# Altium PCB MainBoard.PcbDoc
Units mil, origin at the board's own origin, x right, y up, seen from the top; angles counter-clockwise.
Board outline 6000 x 4000 mil, 2 copper layers (Top Layer, Bottom Layer); 36 components, 41 nets, 155 pads, 0 vias.
Unrouted connection lines stored in the file: 82.
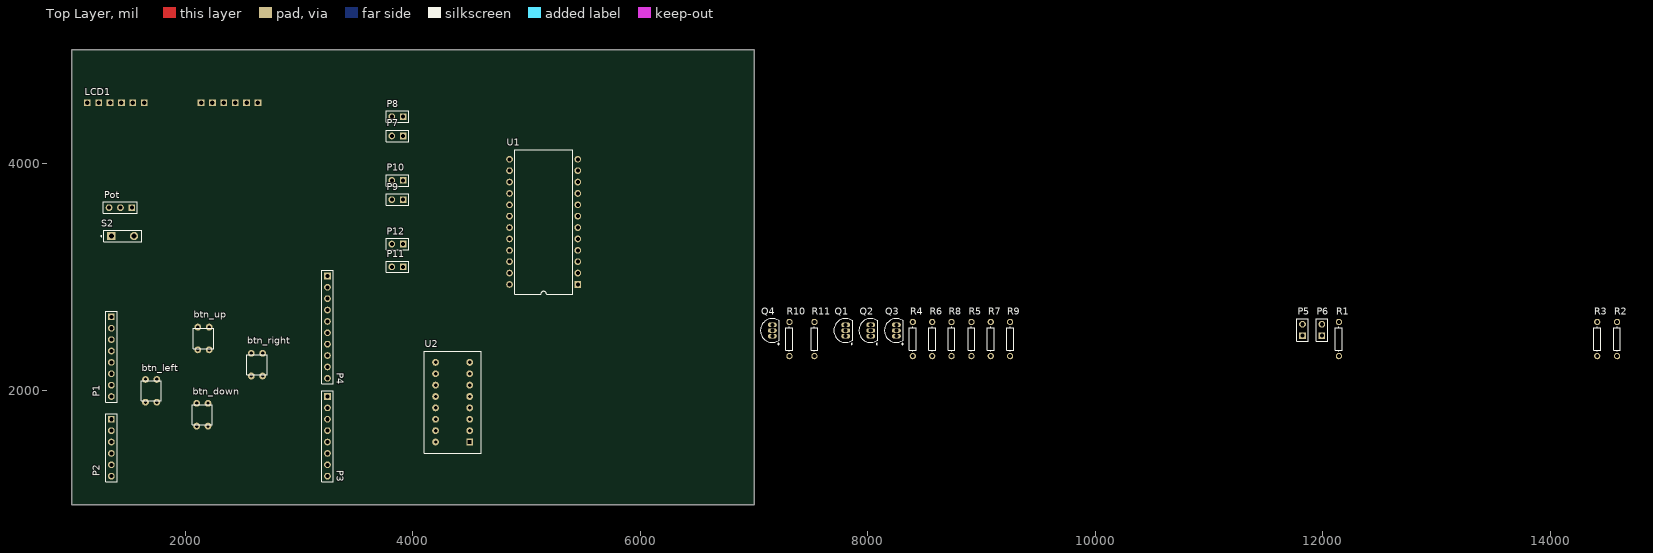
[diagram p0: Top Layer view]
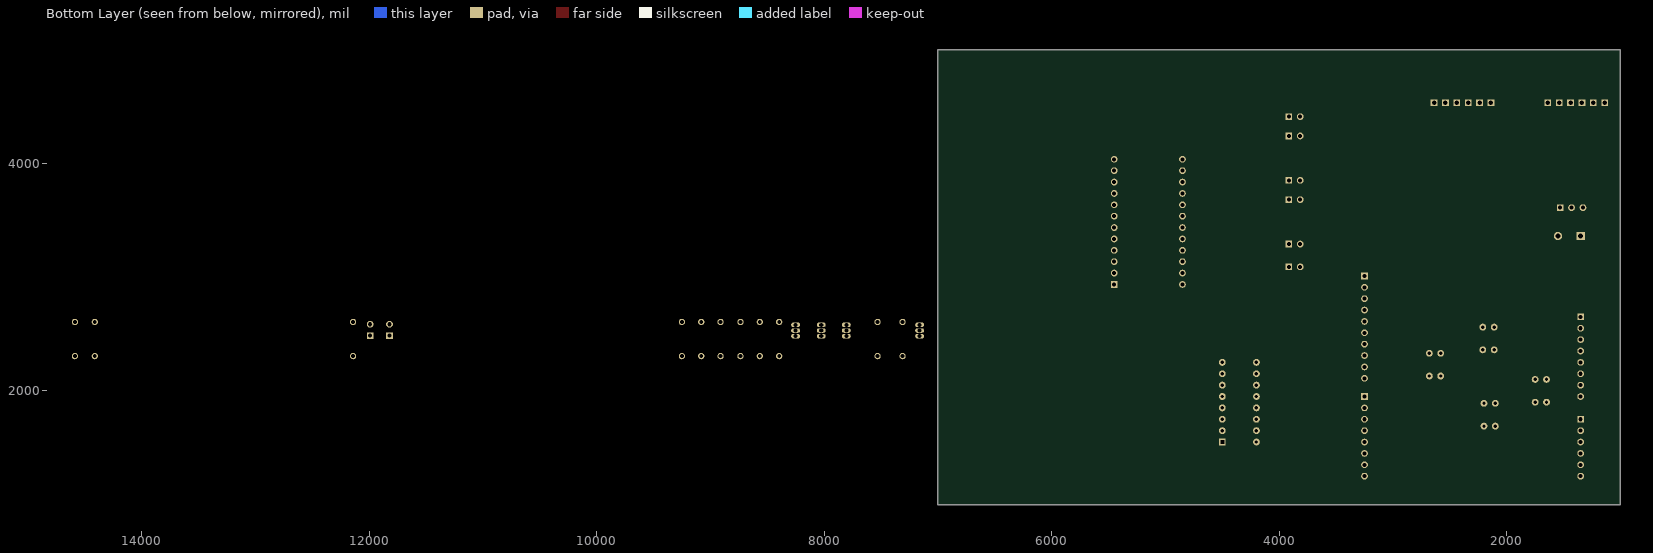
[diagram p1: Bottom Layer view, seen from below]

## Layer stack, top to bottom
Top Solder: solder mask 0.4, Solder Resist, Dk 3.5
Top Layer: signal copper 1.4
Dielectric 1: dielectric 12.6, FR-4, Dk 4.8
Bottom Layer: signal copper 1.4
Bottom Solder: solder mask 0.4, Solder Resist, Dk 3.5

## Board outline
1000,1000 7000,1000 7000,5000 1000,5000

## Design rules (kind name [scope] priority, off if disabled: settings)
Clearance [All] p1: gap=10
PolygonConnect [All] p1: connectstyle=Relief reliefconductorwidth=10 reliefentries=4 polygonreliefangle="90 Angle" airgapwidth=10
RoutingVias [All] p1: holewidth=28 width=50 viastyle="Through Hole" minholewidth=28 minwidth=50 maxholewidth=28 maxwidth=50
SolderMaskExpansion [All] p1: expansion=4
Width [All] p1: maxlimit=10 minlimit=10 preferedwidth=10
30 further rules are at their usual default settings.

## Components (designator, comment, footprint, x,y, rotation, side; value= is the part's Value field where it differs from the comment)
btn_down "SW-PB" swblue 2150,1790 r90 top
btn_left "SW-PB" swblue 1700,2000 r90 top
btn_right "SW-PB" swblue 2630,2230 r90 top
btn_up "SW-PB" swblue 2160,2460 r90 top
LCD1 "lcd" lcd_woborder 2400,3920 r0 top
P1 "Arudino UNO Power" HDR1X8 1350,2650 r270 top
P2 "Arduino UNO Analog" HDR1X6 1350,1750 r270 top
P3 "Arudino UNO Digital_1" HDR1X8 3250,1950 r270 top
P4 "Arduino UNO Digital_2" HDR1X10 3250,3010 r270 top
P5 "Valve_1" HDR1X2 11820,2485 r90 top
P6 "Valve_2" HDR1X2 11990,2485 r90 top
P7 "Valve_3" HDR1X2 3915,4240 r180 top
P8 "Valve_4" HDR1X2 3915,4410 r180 top
P9 "Valve_5" HDR1X2 3915,3680 r180 top
P10 "Valve_6" HDR1X2 3915,3850 r180 top
P11 "Valve_7" HDR1X2 3915,3090 r180 top
P12 "Valve_8" HDR1X2 3915,3290 r180 top
Pot "Pot" HDR1X3 1530,3610 r180 top
Q1 "NPN" TO-226-AA 7805,2530 r0 top
Q2 "NPN" TO-226-AA 8025,2530 r0 top
Q3 "NPN" TO-226-AA 8250,2530 r0 top
Q4 "NPN" TO-226-AA 7160,2530 r0 top
R1 "Res1" AXIAL-0.3 12140,2455 r90 top
R2 "Res1" AXIAL-0.3 14585,2455 r90 top
R3 "Res1" AXIAL-0.3 14410,2455 r90 top
R4 "Res1" AXIAL-0.3 8395,2455 r90 top
R5 "Res1" AXIAL-0.3 8910,2455 r90 top
R6 "Res1" AXIAL-0.3 8565,2455 r90 top
R7 "Res1" AXIAL-0.3 9080,2455 r90 top
R8 "Res1" AXIAL-0.3 8735,2455 r90 top
R9 "Res1" AXIAL-0.3 9250,2455 r90 top
R10 "Res1" AXIAL-0.3 7310,2455 r90 top
R11 "Res1" AXIAL-0.3 7530,2455 r90 top
S2 "Reset Switch" SPST-2 1450,3360 r0 top
U1 "HCC4067BF" CDIP24 5150,3485 r90 top
U2 "CD4099B" CB4099B 4350,1900 r90 top

## Footprints (in the part's own frame and the unit in brackets; to place one, negate y for a bottom-side part, rotate by r counter-clockwise, add the part's x,y. Pads: shape width x height; smd on the part's side, far side on the other; paste and mask are expansions set on the pad)
AXIAL-0.3 [mm] "Axial Device, Thru-Hole; 2 Leads; 0.3 in Pin Spacing"
  round 1.4 hole 0.85: 1(-3.81,0) 2(3.81,0)
  silkscreen extent -2.77,-0.76 2.77,0.76
CB4099B [mil]
  rect 60x60 hole 30 square: 1(-350,-150)
  round 60 hole 30: 2(-250,-150) 3(-150,-150) 4(-50,-150) 5(50,-150) 6(150,-150) 7(250,-150) 8(350,-150) 9(350,150) 10(250,150) 11(150,150) 12(50,150) 13(-50,150) 14(-150,150) 15(-250,150) 16(-350,150)
  silkscreen extent -450,-250 450,250
CDIP24 [mm] "DIP; 24 Leads; Row Spacing 15.24 mm; Pitch 2.54 mm"
  rect 1.5x1.5 hole 0.9: 1(-13.97,-7.62)
  round 1.5 hole 0.9: 2(-11.43,-7.62) 3(-8.89,-7.62) 4(-6.35,-7.62) 5(-3.81,-7.62) 6(-1.27,-7.62) 7(1.27,-7.62) 8(3.81,-7.62) 9(6.35,-7.62) 10(8.89,-7.62) 11(11.43,-7.62) 12(13.97,-7.62) 13(13.97,7.62) 14(11.43,7.62) 15(8.89,7.62) 16(6.35,7.62) 17(3.81,7.62) 18(1.27,7.62) 19(-1.27,7.62) 20(-3.81,7.62) 21(-6.35,7.62) 22(-8.89,7.62) 23(-11.43,7.62) 24(-13.97,7.62)
  silkscreen extent -16.15,-6.45 16.15,6.45
HDR1X2 [mm] "Connector; Header; 2 Position"
  rect 1.5x1.5 hole 0.9: 1(0,0)
  round 1.5 hole 0.9: 2(2.54,0)
  silkscreen extent -1.27,-1.27 3.81,1.27
HDR1X3 [mm] "Connector; Header; 3 Position"
  rect 1.5x1.5 hole 0.9: 1(0,0)
  round 1.5 hole 0.9: 2(2.54,0) 3(5.08,0)
  silkscreen extent -1.27,-1.27 6.35,1.27
HDR1X6 [mm] "Connector; Header; 6 Position"
  rect 1.5x1.5 hole 0.9: 1(0,0)
  round 1.5 hole 0.9: 2(2.54,0) 3(5.08,0) 4(7.62,0) 5(10.16,0) 6(12.7,0)
  silkscreen extent -1.27,-1.27 13.97,1.27
HDR1X8 [mm] "Connector; Header; 8 Position"
  rect 1.5x1.5 hole 0.9: 1(0,0)
  round 1.5 hole 0.9: 2(2.54,0) 3(5.08,0) 4(7.62,0) 5(10.16,0) 6(12.7,0) 7(15.24,0) 8(17.78,0)
  silkscreen extent -1.27,-1.27 19.05,1.27
HDR1X10 [mm] "Connector; Header; 10 Position"
  rect 1.5x1.5 hole 0.9: 1(0,0)
  round 1.5 hole 0.9: 2(2.54,0) 3(5.08,0) 4(7.62,0) 5(10.16,0) 6(12.7,0) 7(15.24,0) 8(17.78,0) 9(20.32,0) 10(22.86,0)
  silkscreen extent -1.27,-1.27 24.13,1.27
lcd_woborder [mm]
  rect 1.5x1.5 hole 1: 1(-32.038,15.552) 2(-29.498,15.552) 3(-26.958,15.552) 4(-24.418,15.552) 5(-21.878,15.552) 6(-19.338,15.552) 11(-6.638,15.552) 12(-4.098,15.552) 13(-1.558,15.552) 14(0.982,15.552) 15(3.522,15.552) 16(6.062,15.552)
SPST-2 [mm] "Switch; 2 Leads"
  rect 1.85x1.85 hole 1.1: 1(-2.54,0)
  round 1.85 hole 1.1: 2(2.54,0)
  silkscreen extent -4.89,-1.27 4.28,1.27
swblue [mil]
  round 60 hole 30: 0(100,-50) 0(100,50) 1(-100,50) 2(-100,-50)
  silkscreen extent -89,-89 89,89
TO-226-AA [mm] "TO, Flat Index; 3 In-Line, Axial Leads; Body Dia. 4.8mm; Leads 0.55 x 0.51 mm (max)"
  oval 2x1 hole 0.9: 1(0,-1.27) 2(0,0) 3(0,1.27)
  silkscreen extent -2.65,-3.13 1.52,2.65, body extent -2.66,-2.66 1.52,2.66, height 5.33

## Part data
btn_down btn_left btn_right btn_up: "Switch"
P1 P3: library part "Header 8", "Header, 8-Pin"
P2: library part "Header 6", "Header, 6-Pin"
P4: library part "Header 10", "Header, 10-Pin"
P5 P6 P7 P8 P9 P10 P11 P12: library part "Header 2", "Header, 2-Pin"
Pot: library part "Header 3", "Header, 3-Pin"
Q1 Q2 Q3 Q4: "NPN Bipolar Transistor"
R1 R2 R3 R4 R5 R6 R7 R8 R9 R10 R11: "Resistor"
S2: library part SW-PB, "Switch"
U1: "Analog Multiplexer/Demultiplexer"

## Nets (pads, with @x,y where several pads share a name; then routed paths per layer and width w, separated by ;. In a path a pad name is that pad's centre, name@x,y a point inside that pad or via, vN(x,y) a via of type N, cw(c..) or ccw(c..) an arc to the next point about the centre after c; other vN are vias at no path point)
D4: LCD1.11 P3.5
D5: LCD1.12 P3.4
D6: LCD1.13 P3.3
D7: LCD1.14 P3.2
DOWN: btn_down.1 U1.7
E: LCD1.6 P3.6
LATCH_A0: Q1.1 R5.2 U2.5
LATCH_A0_5: P4.7 R4.1
LATCH_A1: Q2.1 R7.2 U2.6
LATCH_A1_5: P4.6 R6.1
LATCH_A2: Q3.1 R9.2 U2.7
LATCH_A2_5: P4.5 R8.1
LATCH_DATA: Q4.1 R11.2 U2.3
LATCH_DATA_5: P2.5 R10.1
LEFT: btn_left.1 U1.6
MUX_A: P3.1 U1.10
MUX_B: P4.10 U1.11
MUX_C: P4.9 U1.14
MUX_D: P4.8 U1.13
MUX_X: P2.6 U1.1
NetLCD1_15: LCD1.15 R3.2
NetP1_3: P1.3 R1.2 S2.2
NetPot_1: Pot.1 R2.1
NetQ1_2: Q1.2 R4.2
NetQ2_2: Q2.2 R6.2
NetQ3_2: Q3.2 R8.2
NetQ4_2: Q4.2 R10.2
RIGHT: btn_right.1 U1.8
RS: LCD1.4 P3.8
RW: LCD1.5 P3.7
UP: btn_up.1 U1.9
VALVE_1: P5.1 U2.9
VALVE_2: P6.1 U2.10
VALVE_3: P7.1 U2.11
VALVE_4: P8.1 U2.12
VALVE_5: P9.1 U2.13
VALVE_6: P10.1 U2.14
VALVE_7: P11.1 U2.15
VALVE_8: P12.1 U2.1
VCC_12: btn_down.2 btn_left.2 btn_right.2 btn_up.2 LCD1.1 LCD1.2 LCD1.16 P1.6 P1.7 P1.8 P5.2 P6.2 P7.2 P8.2 P9.2 P10.2 P11.2 P12.2 Pot.3 Q1.3 Q2.3 Q3.3 Q4.3 R1.1 R2.2 R3.1 R5.1 R7.1 R9.1 R11.1 S2.1 U1.12 U1.15 U1.24 U2.2 U2.4 U2.8 U2.16
VEE: LCD1.3 Pot.2
pads on no net: btn_down.0 btn_left.0 btn_right.0 btn_up.0 P1.1 P1.2 P1.4 P1.5 P2.1 P2.2 P2.3 P2.4 P4.1 P4.2 P4.3 P4.4 U1.2 U1.3 U1.4 U1.5 U1.16 U1.17 U1.18 U1.19 U1.20 U1.21 U1.22 U1.23